# Altium PCB cambienmua.PcbDoc
Units mil, origin at the board's own origin, x right, y up, seen from the top; angles counter-clockwise.
Board outline 2505 x 1415 mil, 2 copper layers (Top Layer, Bottom Layer); 12 components, 7 nets, 33 pads, 4 vias.
Unrouted connection lines stored in the file: 2.
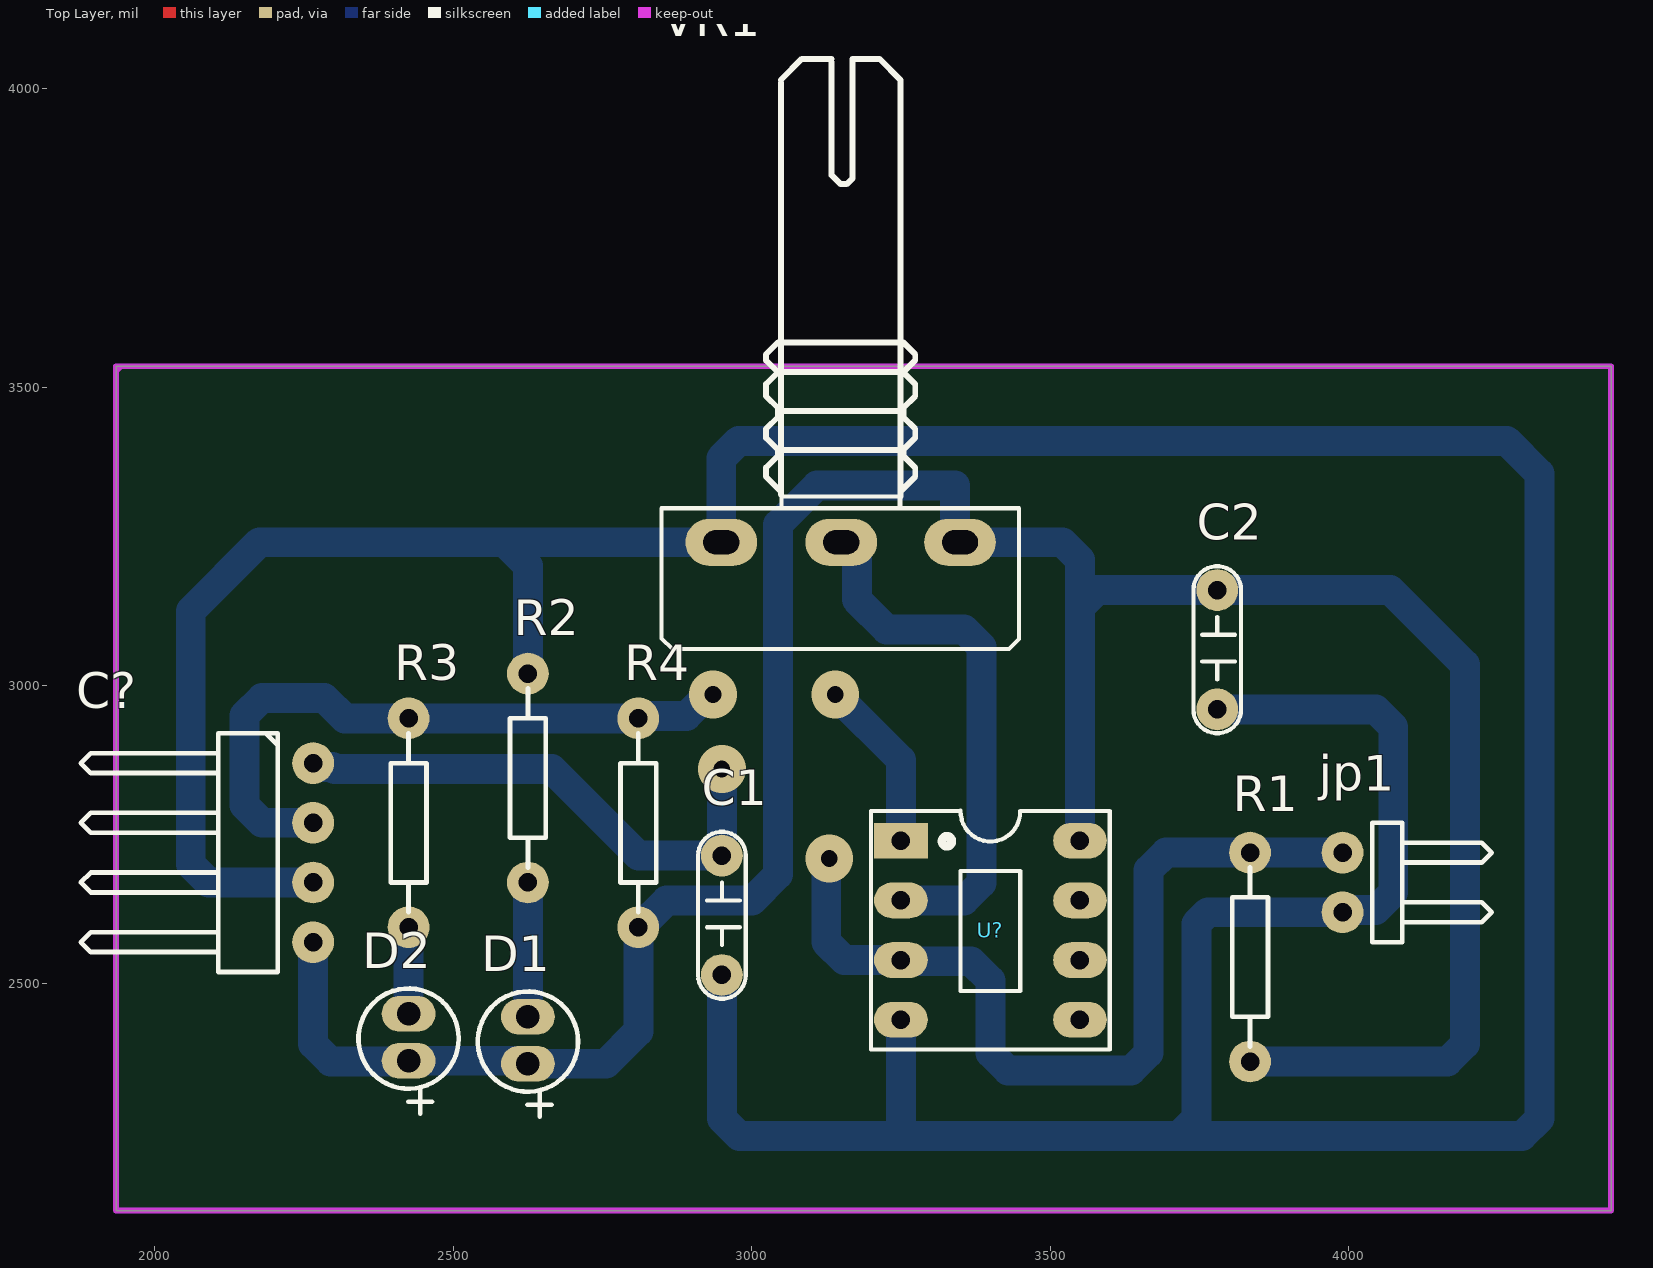
[diagram p0: Top Layer view]
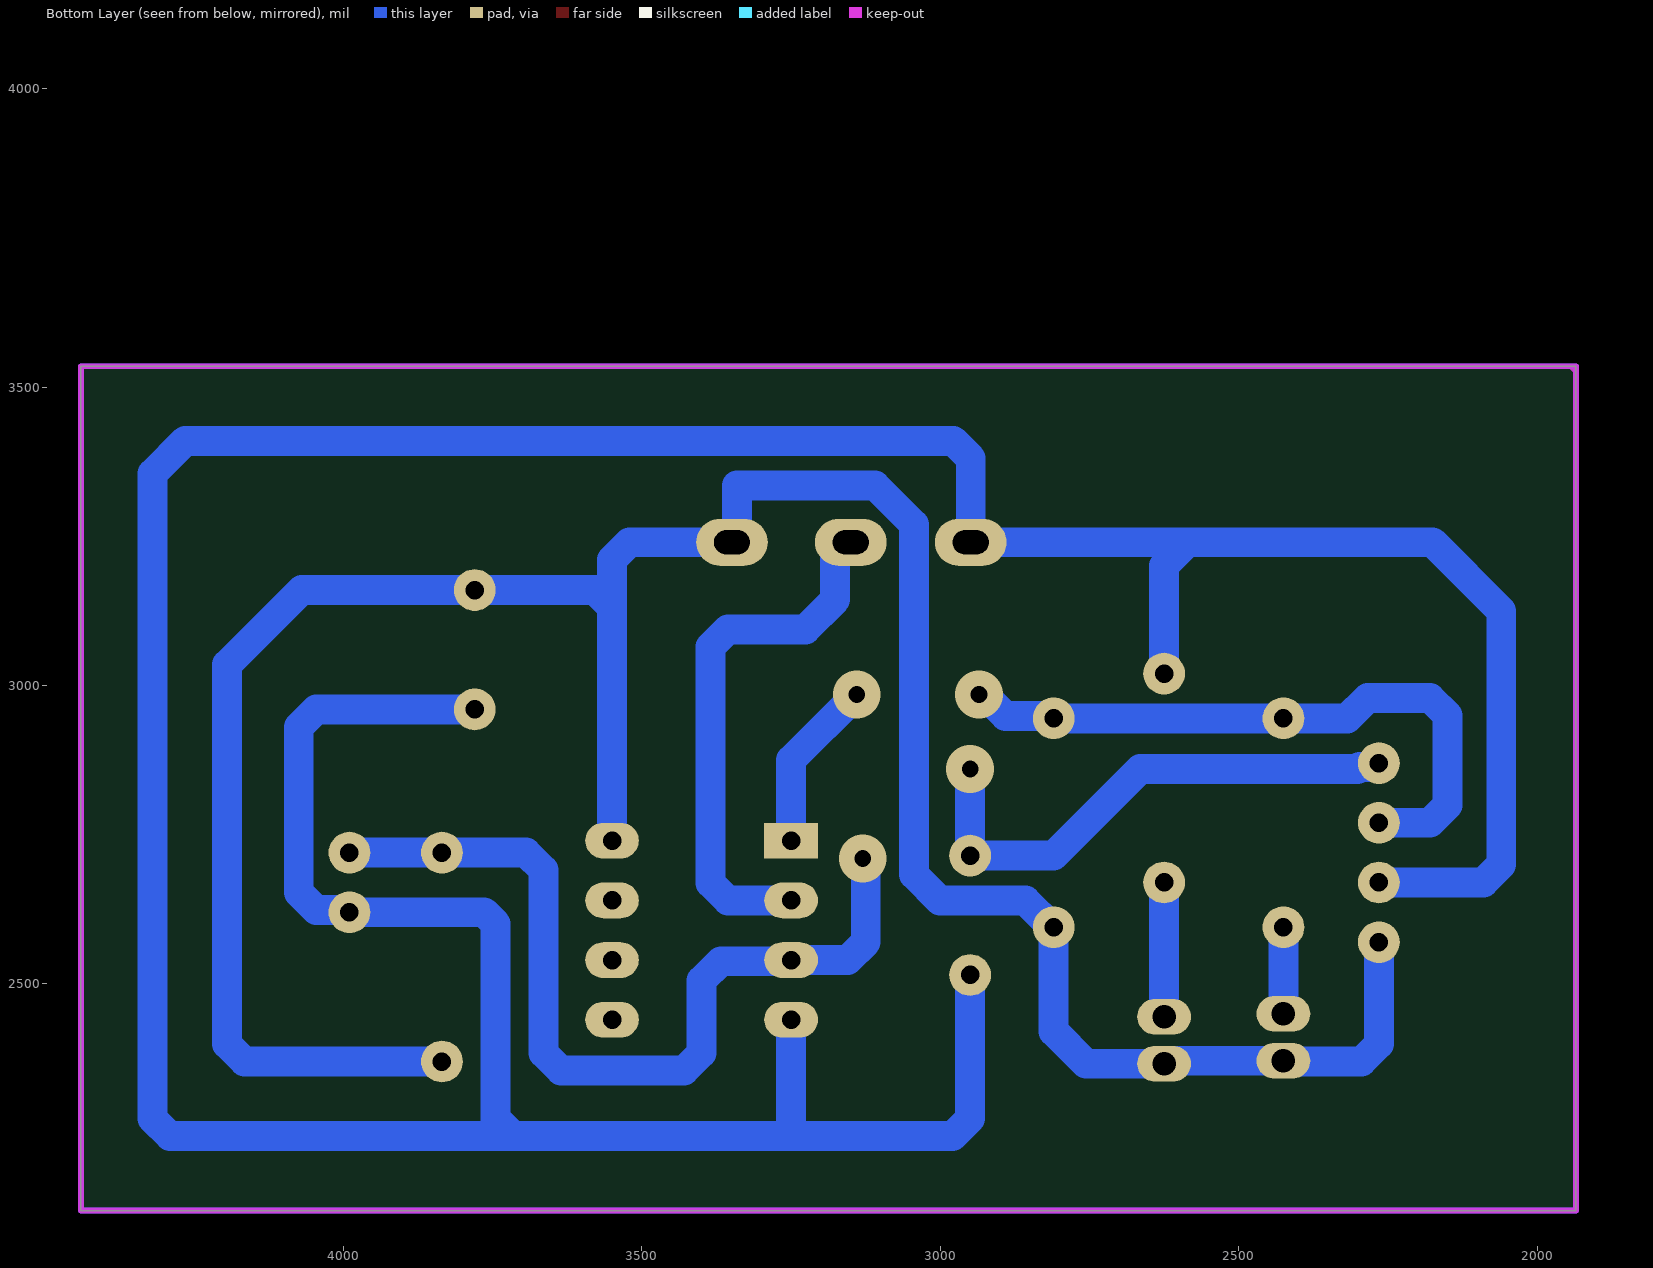
[diagram p1: Bottom Layer view, seen from below]
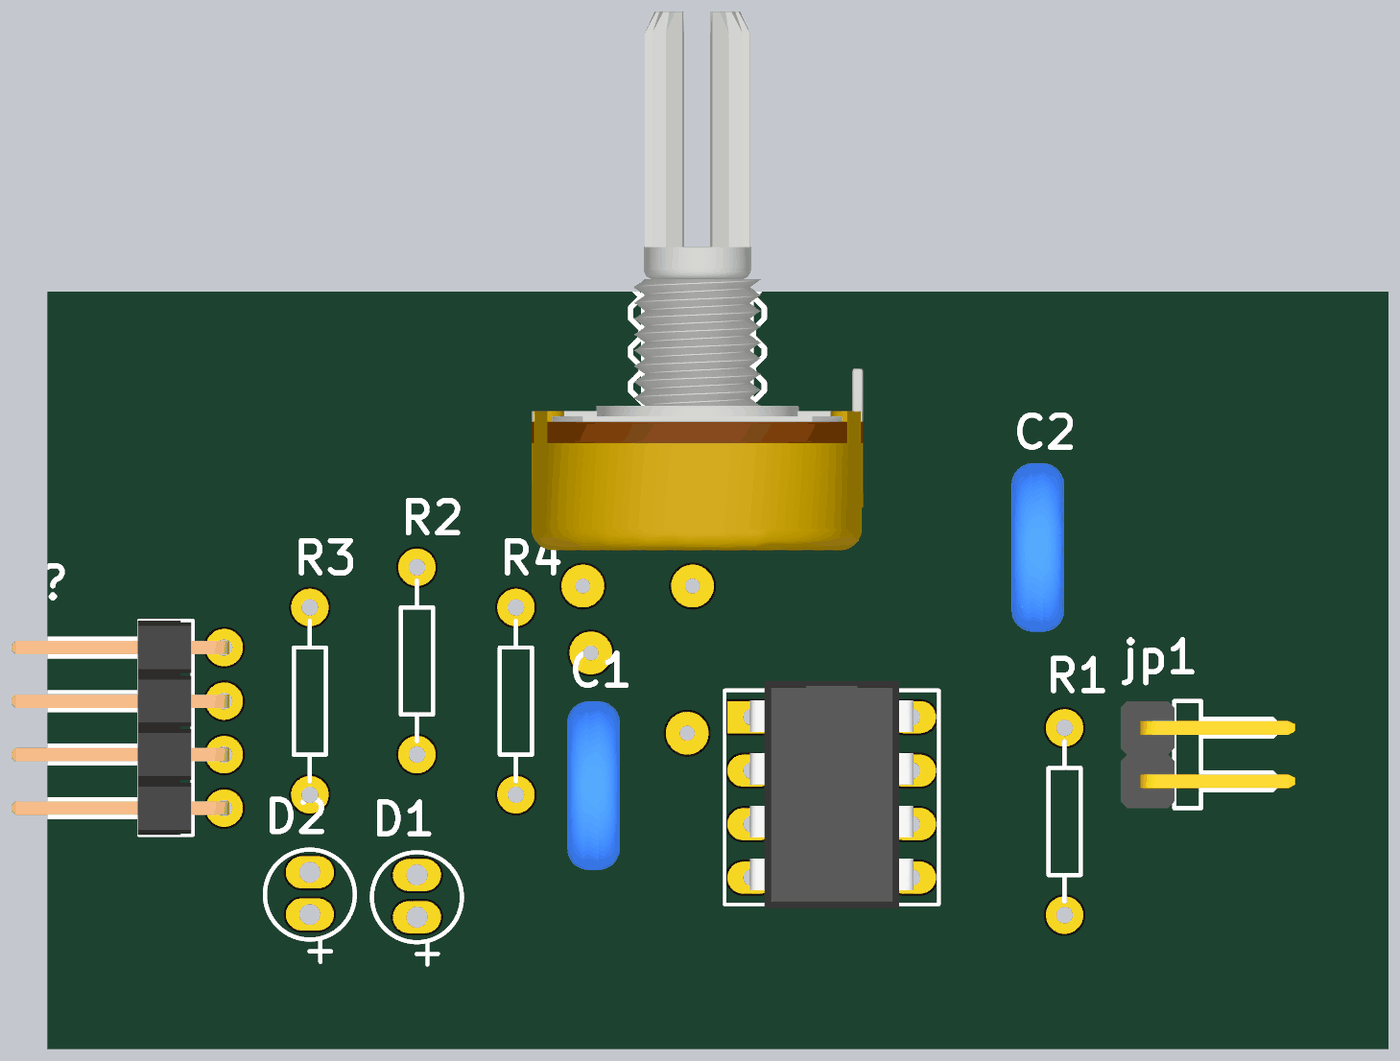
[diagram p2: 3D render of the assembled board from above, using the file's embedded part models]

## Layer stack, top to bottom
Top Solder: solder mask 0.4, Solder Resist, Dk 3.5
Top Layer: signal copper 1.4
Dielectric 1: dielectric 12.6, FR-4, Dk 4.8
Bottom Layer: signal copper 1.4
Bottom Solder: solder mask 0.4, Solder Resist, Dk 3.5

## Board outline
1935,2120 4440,2120 4440,3535 1935,3535

## Design rules (kind name [scope] priority, off if disabled: settings)
Clearance [All] p1: gap=10 ignorepadtopadclearanceinfootprint=FALSE
PolygonConnect [All] p1: connectstyle=Relief reliefconductorwidth=10 reliefentries=4 polygonreliefangle="90 Angle" airgapwidth=10
RoutingVias [All] p1: holewidth=28 width=50 viastyle="Through Hole" minholewidth=28 minwidth=50 maxholewidth=28 maxwidth=50
SolderMaskExpansion [All] p1: expansion=4 istentingtop=FALSE
SupplyNets "Schematic Supply Nets_1" [InNet('GND')] p1: voltage=0.000
SupplyNets "Schematic Supply Nets" [InNet('VCC')] p2: voltage=0.000
Width [All] p1: maxlimit=50 minlimit=20 preferedwidth=40
30 further rules are at their usual default settings.

## Components (designator, comment, footprint, x,y, rotation, side; value= is the part's Value field where it differs from the comment)
C1 "104" CN2 2950,2715 r270 top value=0.1uF
C2 "104" CN2 3780,3160 r270 top value=0.1uF
C? "JP4" JP4-D1C 2165,2520 r270 top
D1 "LED" CAP10UF 2625,2445 r270 top
D2 "LED" CAP10UF 2425,2450 r270 top
jp1 "Header 2H" HDR1X2H 3990,2620 r90 top
R1 "10k" R1/6W 3835,2545 r90 top value="R1/4W - 1K"
R2 "1k" R1/6W 2625,2845 r270 top value="R1/4W - 1K"
R3 "1k" R1/6W 2425,2770 r270 top value="R1/4W - 1K"
R4 "10k" R1/6W 2810,2770 r270 top value="R1/4W - 1K"
U? "LM393" DIP8 3400,2595 r270 top
VR1 "10K" VR-S1 3149,3240 r180 top value="Volume 50k"

## Footprints (in the part's own frame and the unit in brackets; to place one, negate y for a bottom-side part, rotate by r counter-clockwise, add the part's x,y. Pads: shape width x height; smd on the part's side, far side on the other; paste and mask are expansions set on the pad)
CAP10UF [mil]
  oval 60x90 hole 39.37 unplated: 1(78.74,0) 2(0,0)
  silkscreen extent -42,-84 167,84
CN2 [mil]
  round 70 hole 31: 1(0,0) 2(200,0)
  silkscreen extent -40,-40 240,40, body extent -54,-44 260,55, height 407
DIP8 [mil] "DIP, 8-Leads, Row Spacing 7.62mm, Pitch 2.54mm, Body 9.91x6.73mm"
  rect 60x90 hole 31: 1(-145,-150)
  oval 60x90 hole 31: 2(-45,-150) 3(55,-150) 4(155,-150) 5(155,150) 6(55,150) 7(-45,150) 8(-145,150)
  silkscreen extent -195,-200 205,200, body extent -213,-153 213,153, height 177
HDR1X2H [mil] "Connector; Header; 2 Position; Right Angle"
  round 70 hole 31: 1(0,0) 2(100,0)
  silkscreen extent -50,-250 150,-50, body extent -50,-276 150,50, height 170
JP4-D1C [mil] "4 pins, 1 row, right angled, gold plating"
  round 70 hole 31: 1(-350,100) 2(-250,100) 3(-150,100) 4(-50,100)
  silkscreen extent -400,-289 0,41, body extent -400,-298 0,110, height 100
R1/6W [mil]
  round 70 hole 31: 1(-175,0) 2(175,0)
  silkscreen extent -150,-30 150,30
VR-S1 [mil]
  oval 120x78.74 hole 40 slot 60 at 0 deg: 1(-200,0) 2(-1,0) 3(200,0)
  silkscreen extent -299,-810 300,179, body extent -310,-818 310,188, height 839

## Part data
C1 C2: library part CN2, "Cap np 104 => 105pF"
C?: "WR-PHD 2.54 mm Angled Socket Header", Manufacturer="W¨¹rth Elektronik eiSos GmbH", partNo=613004143121, ComponentLink1 Description=Manufacturer, ComponentLink1URL=http://www.we-online.com, ComponentLink2 Description=Datasheet, ComponentLink2URL=http://katalog.we-online.de/em/datasheet/6130xx143121.pdf, Created by="Karrer Zheng", Created Date="29 March 2013", NoPins=04
jp1: "Header, 2-Pin, Right Angle", LatestRevisionDate=17-Jul-2002, LatestRevisionNote="Re-released for DXP Platform.", Publisher="Altium Limited"
R1 R2 R3 R4: library part Res, "Resistor 1/4W"
U?: "IC DUAL COMPARATOR"
VR1: library part VR-S, "Var Resistor"

## Via types
v1: diameter 80, hole 28, Top Layer to Bottom Layer, 4 vias

## Nets (pads, with @x,y where several pads share a name; then routed paths per layer and width w, separated by ;. In a path a pad name is that pad's centre, name@x,y a point inside that pad or via, vN(x,y) a via of type N, cw(c..) or ccw(c..) an arc to the next point about the centre after c; other vN are vias at no path point)
AC: C1.1 C?.1 jp1.2 R1.2 U?.3 | length 2392.1
  Bottom Layer w50: C?.1 2271.5,2863.5 2297.28,2863.5 2300.79,2860 2665,2860 2810,2715 C1.1 v1(2950,2860) ; v1(3130,2710) 3125,2705 3125,2570 3155,2540 U?.3 3251.91,2538.09 3367.62,2538.09 3400,2505.71 3400,2384.29 3429.29,2355 3635.71,2355 3665,2384.29 3665,2690.71 3694.29,2720 R1.2 jp1.2
GND: C1.2 C2.2 C?.3 jp1.1 R2.1 U?.4 VR1.3 | length 7579.1
  Bottom Layer w50: C?.3 2090,2670 2060,2700 2060,3125 2175,3240 2605.71,3240 ; R2.1 2625,3200.71 2595.71,3230 2605.71,3240 ; C1.2 2950,2274.29 2979.29,2245 3255,2245 ; U?.4 3250,2250 3255,2245 ; C2.2 4045.71,2960 4075,2930.71 4075,2653.12 4045.71,2623.83 3993.83,2623.83 jp1.1 3764.29,2620 3745,2600.71 3745,2274.64 3715.36,2245 ; 2605.71,3240 VR1.3 2949,3380.71 2978.29,3410 4265,3410 4320,3355 4320,2274.29 4290.71,2245 3715.36,2245 ; 3255,2245 3715.36,2245
IN: U?.2 VR1.2 | length 898.8
  Bottom Layer w50: VR1.2 3162.85,3240 3176.13,3226.72 3176.13,3143.87 3225.85,3094.15 3355.71,3094.15 3385,3064.86 3385,2669.29 3355.71,2640 U?.2
NetD1_2: D1.2 R2.2 | length 225
  Bottom Layer w50: D1.2 R2.2
NetD2_2: D2.2 R3.2 | length 145
  Bottom Layer w50: D2.2 R3.2
OUT: C?.2 R3.1 R4.1 U?.1 | length 1396.3
  Bottom Layer w50: C?.2 2179.29,2770 2150,2799.29 2150,2950 2179.29,2979.29 2283.77,2979.29 2318.06,2945 R3.1 R4.1 2813.83,2948.83 2890.71,2948.83 2926.88,2985 v1(2935,2985) ; v1(3140,2985) 3250,2875 U?.1
VCC: C2.1 C?.4 D1.1 D2.1 R1.1 R4.2 U?.8 VR1.1 | length 4621.3
  Top Layer w20: D2.1 D2.1@2435,2361.26
  Bottom Layer w50: C?.4 2265,2399.29 2294.29,2370 2423.74,2370 D2.1 2602.29,2371.26 2607.29,2366.26 D1.1 2755.71,2366.26 2810,2420.55 R4.2 2812.45,2595 2857.45,2640 3000.71,2640 3044,2683.29 3044,3269.71 3109.29,3335 3340.71,3335 3340.71,3248.29 VR1.1 3520.71,3240 3550,3210.71 3550,3130.71 ; U?.8 3550,3130.71 ; R1.1 4165.71,2370 4195,2399.29 4195,3035 4070,3160 C2.1 3579.29,3160 3550,3130.71
pads on no net: U?.5 U?.6 U?.7
copper on no net: | length 7840
  Bottom Layer w10: 1935,2120 1935,3535 4440,3535 4440,2120 1935,2120

## Keep-outs
Keep-Out Layer:
  lines w10: 1935,3527.5 1942.5,3535 4440,3535 ; 1935,2120 4440,2120 ; 1935,2120 1935,3535 ; 1935,2120 4440,2120 ; 1935,2120 1935,2185 1935,3520 1935,3535 ; 1935,3535 4440,3535 ; 4440,2120 4440,3535 ; 4440,2120 4440,3535